# Altium PCB final_sensor_pcb.PcbDoc (part 2 of 3)
Units mm, origin at the board's own origin, x right, y up, seen from the top; angles counter-clockwise.
Board outline 100.5 x 21.64 mm, 2 copper layers (Top Layer, Bottom Layer); 86 components, 53 nets, 234 pads, 76 vias.
Unrouted connection lines stored in the file: 1.
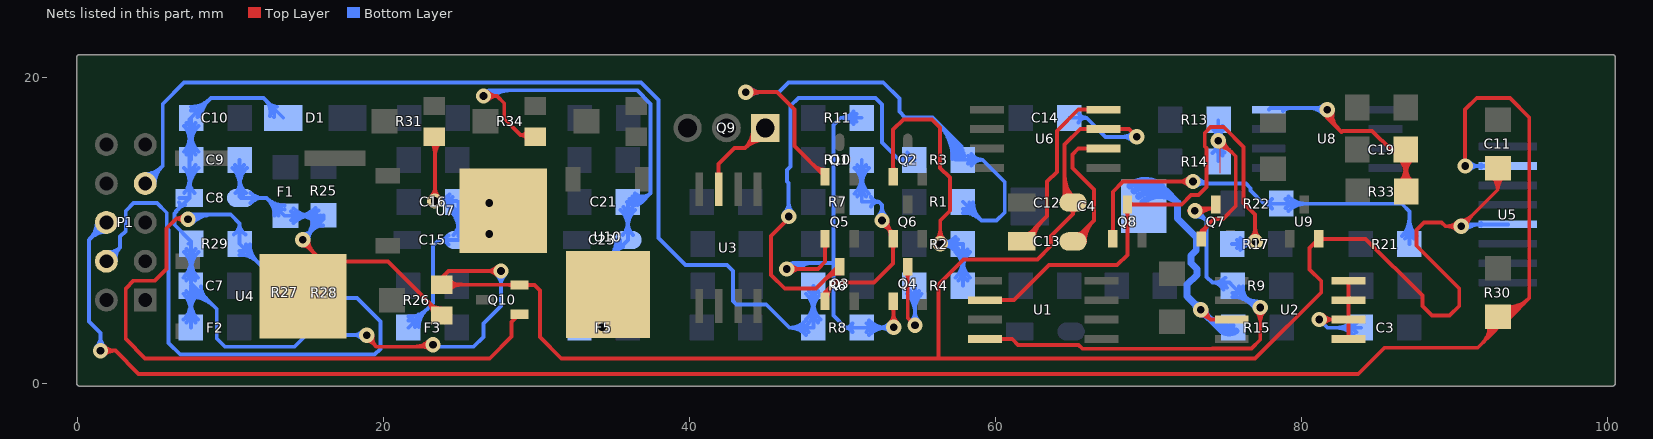
[diagram p2: the nets of this part, all layers, seen from the top]

## Via types
v1: diameter 1, hole 0.5, Top Layer to Bottom Layer, 76 vias

## Nets (pads, with @x,y where several pads share a name; then routed paths per layer and width w, separated by ;. In a path a pad name is that pad's centre, name@x,y a point inside that pad or via, vN(x,y) a via of type N, cw(c..) or ccw(c..) an arc to the next point about the centre after c; other vN are vias at no path point) (continued)
HGND: C7.1 C8.2 C9.1 C10.1 C11.1 C12.1 C14.1 D1.1 F2.2 Q10.2 R26.3 R28.1 R29.1 U5.4 U6.3 U9.2 | length 272.5
  Top Layer w0.254: v1@18.923,2.802 cw(c18.923,2.208) 19.343,2.628 ; v1(18.923,3.175) 18.796,3.175 19.558,2.413 23.241,2.413 v1(23.241,2.54) ; v1@19.291,3.113 ccw(c20.01,2.992) 19.494,2.477 ; 22.034,2.413 ccw(c22.034,3.747) v1@22.977,2.804 ; v1@22.977,2.276 ccw(c22.647,1.946) 22.647,2.413 ccw(c22.647,3.134) v1@23.157,2.624 ; R26.3@23.825,6.461 23.825,6.934 24.257,7.366 v1(27.686,7.366) ; R26.3@23.876,6.477 Q10.2@28.875,6.461 ; R26.3@24.258,6.125 cw(c25.101,5.277) 25.105,6.473 ; R26.3@24.261,6.794 ccw(c25.032,7.561) 25.029,6.473 ; v1@27.422,7.102 ccw(c26.786,6.466) 26.786,7.366 ccw(c26.786,8.266) v1@27.422,7.63 ; 28.154,6.463 cw(c28.152,5.978) Q10.2@28.496,6.32 ; 28.249,6.463 ccw(c28.25,6.813) Q10.2@28.497,6.565 ; Q10.2@28.894,6.442 29.88,6.442 30.226,6.096 30.226,3.048 31.623,1.651 76.962,1.651 81.28,5.969 81.28,6.707 80.518,7.469 80.518,8.86 U9.2@81.118,9.46 84.183,9.46 87.884,5.759 87.884,5.08 88.519,4.445 89.662,4.445 90.297,5.08 90.297,6.223 87.503,9.017 87.503,10.033 88.003,10.533 89.138,10.533 89.384,10.287 v1(90.424,10.287) 92.812,12.675 ; Q10.2@29.291,6.32 cw(c29.587,6.024) 29.587,6.442 cw(c29.587,6.86) Q10.2@29.291,6.564 ; 56.261,1.651 56.261,6.477 57.912,8.128 62.738,8.128 63.627,9.017 63.627,9.652 65.06,11.085 ; C12.1@64.426,12.171 ccw(c64.209,12.388) 64.516,12.388 ; 64.516,12.955 ccw(c65.879,12.955) C12.1@64.915,11.991 ; 64.516,13.568 ccw(c66.492,13.568) C12.1@65.095,12.171 ; C12.1@64.856,11.41 cw(c64.701,11.085) 65.06,11.085 ; C12.1@65.265,11.41 ccw(c65.42,11.085) 65.06,11.085 ; U6.3@66.119,16.55 ccw(c65.909,16.34) 65.909,16.637 ccw(c65.909,16.934) U6.3@66.119,16.724 ; U6.3@67.993,16.55 cw(c68.203,16.34) 68.203,16.637 cw(c68.203,16.934) U6.3@67.993,16.724 ; v1(69.215,16.129) 68.707,16.637 U6.3@67.056,16.637 65.532,16.637 64.516,15.621 64.516,12.381 C12.1@65.06,11.836 65.06,11.085 ; 80.795,9.137 cw(c81.107,8.826) U9.2@81.121,9.266 ; U9.2@81.24,9.338 cw(c81.536,9.042) 81.536,9.46 cw(c81.536,9.878) U9.2@81.24,9.582 ; v1@90.16,10.023 ccw(c89.524,9.387) 89.524,10.287 ccw(c89.524,11.187) v1@90.16,10.551 ; v1@90.424,10.66 ccw(c90.424,11.56) 91.061,10.924 ccw(c91.697,10.287) v1@90.797,10.287 ; C11.1@92.388,13.562 cw(c91.671,12.675) 92.812,12.675 ; C11.1@92.548,13.759 cw(c92.101,13.207) 92.812,13.207 cw(c93.522,13.207) C11.1@93.075,13.759 ; C11.1@92.62,13.44 cw(c92.543,13.183) 92.812,13.183 ; C11.1@93.003,13.44 ccw(c93.08,13.183) 92.812,13.183 ; C11.1@93.235,13.562 ccw(c93.953,12.675) 92.812,12.675 ; 92.812,12.675 C11.1@92.812,14.085 92.812,13.183
  Bottom Layer w0.254: 6.615,11.422 ccw(c6.377,11.66) C8.2@6.648,11.858 ; C8.2@6.676,12.137 C8.2@7.33,12.137 ; C8.2@6.735,11.542 cw(c7.03,11.247) C8.2@7.03,11.664 ; C7.1@6.941,5.875 cw(c5.763,4.697) 7.429,4.697 ; C7.1@6.941,6.927 ccw(c5.725,8.142) 7.444,8.142 ; F2.2@6.953,4.184 ccw(c5.804,5.332) 7.429,5.332 ccw(c9.054,5.332) F2.2@7.905,4.184 ; R29.1@6.969,8.618 cw(c5.82,7.469) 7.444,7.469 cw(c9.069,7.469) R29.1@7.92,8.618 ; C9.1@6.969,14.105 cw(c6.095,13.231) 7.33,13.231 ; C8.2@6.996,12.472 ccw(c6.188,13.279) 7.33,13.279 ccw(c8.472,13.279) C8.2@7.665,12.472 ; C7.1@7.121,6.055 cw(c6.376,5.31) 7.429,5.31 ; C7.1@7.121,6.747 ccw(c6.339,7.529) 7.444,7.529 ; F2.2@7.133,4.004 ccw(c6.417,4.719) 7.429,4.719 ccw(c8.44,4.719) F2.2@7.725,4.004 ; R29.1@7.148,8.798 cw(c6.433,8.083) 7.444,8.083 cw(c8.456,8.083) R29.1@7.741,8.798 ; C9.1@7.148,14.977 ccw(c6.433,15.692) 7.444,15.692 ccw(c8.456,15.692) 7.741,14.977 cw(c8.732,15.968) 7.33,15.968 ; C10.1@7.148,17.027 cw(c6.433,16.312) 7.444,16.312 cw(c8.456,16.312) 7.741,17.027 ccw(c8.732,16.036) 7.33,16.036 ; R29.1@7.263,9.144 R29.1@7.444,9.144 ; C8.2@7.33,12.68 cw(c9.345,12.68) C9.1@7.92,14.105 ; 7.33,13.293 cw(c8.732,13.293) C9.1@7.741,14.284 ; C9.1@7.33,15.423 cw(c9.345,15.423) 7.92,16.848 ccw(c9.069,15.699) 7.444,15.699 ccw(c5.82,15.699) 6.969,16.848 cw(c6.095,15.975) 7.33,15.975 ; 7.33,16.03 cw(c6.095,16.03) 6.969,15.156 ccw(c5.82,16.305) 7.444,16.305 ccw(c9.069,16.305) 7.92,15.156 cw(c9.345,16.581) C10.1@7.33,16.581 ; C7.1@7.417,5.678 cw(c7.417,3.507) 8.952,5.042 ; C7.1@7.417,5.932 cw(c7.417,4.375) 8.518,5.476 ; C7.1@7.417,6.186 cw(c7.417,5.242) C7.1@8.084,5.909 ; C7.1@7.417,6.401 7.429,6.389 F2.2@7.429,3.658 ; 7.429,4.755 cw(c9.013,4.755) C7.1@7.893,5.875 ; 7.429,5.368 cw(c8.399,5.368) C7.1@7.713,6.055 ; 7.444,7.396 ccw(c8.362,7.396) C7.1@7.713,6.747 ; 7.444,8.009 ccw(c8.975,8.009) C7.1@7.893,6.927 ; C9.1@7.444,14.63 C10.1@7.444,17.374 ; C10.1@7.444,17.843 ccw(c7.444,18.975) 8.245,18.174 ; C10.1@7.444,18.097 ccw(c7.444,19.842) 8.679,18.608 ; C10.1@7.863,17.424 cw(c8.754,17.424) C10.1@8.124,18.054 ; C7.1@8.09,6.351 ccw(c9.169,6.351) 8.406,5.588 ; C10.1@8.117,17.424 cw(c9.621,17.424) 8.558,18.487 ; 12.294,18.542 cw(c11.478,17.726) D1.1@12.604,17.476 ; 12.511,18.325 ccw(c13.062,18.876) D1.1@13.062,18.097 ; D1.1@12.621,18.215 cw(c12.013,17.607) D1.1@12.852,17.42 ; D1.1@13.462,17.374 12.167,18.669 8.74,18.669 C10.1@7.444,17.374 ; 14.92,3.135 ccw(c13.686,4.369) R28.1@15.431,4.369 ; 15.041,3.255 cw(c16.104,2.192) R28.1@16.104,3.696 ; 15.354,3.568 ccw(c14.553,4.369) R28.1@15.685,4.369 ; R28.1@15.474,3.689 cw(c16.104,3.059) R28.1@16.104,3.95 ; R28.1@16.204,3.696 cw(c16.204,2.192) 17.268,3.255 ; R28.1@16.204,3.95 cw(c16.204,3.059) R28.1@16.834,3.689 ; R28.1@16.623,4.352 ccw(c17.615,4.312) R28.1@16.913,3.61 ; R28.1@16.877,4.342 ccw(c18.404,4.281) 17.323,3.2 ; v1@18.659,2.911 ccw(c18.023,2.275) 18.023,3.175 ccw(c18.023,4.075) v1@18.659,3.439 ; v1(18.923,3.175) 17.348,3.175 R28.1@16.154,4.369 14.199,2.413 9.648,2.413 9.118,2.943 9.118,4.876 7.444,6.549 R29.1@7.444,9.144 ; v1(23.241,2.54) 23.368,2.413 25.901,2.413 26.543,3.055 26.543,3.937 27.686,5.08 v1(27.686,7.366) ; v1@27.422,7.102 cw(c26.786,6.466) 27.686,6.466 cw(c28.586,6.466) v1@27.95,7.102 ; C14.1@64.821,17.374 65.938,17.374 ; C14.1@65.416,17.059 cw(c65.938,16.782) 65.938,17.374 ; C14.1@65.416,17.688 ccw(c65.938,17.965) 65.938,17.374 ; v1@68.951,15.865 ccw(c68.315,15.229) 68.315,16.129 ccw(c68.315,17.029) v1@68.951,16.393 ; v1(69.215,16.129) 67.183,16.129 65.938,17.374 ; v1@90.424,10.414 U5.4@93.472,10.414 ; v1@90.508,10.203 cw(c91.018,9.693) 91.018,10.414 cw(c91.018,10.881) v1@90.688,10.551 ; v1@90.688,10.023 cw(c91.631,9.08) U5.4@91.631,10.414 ; U5.4@91.73,10.327 ccw(c91.52,10.117) 91.52,10.414 ccw(c91.52,10.711) U5.4@91.73,10.501 ; C8.2@7.33,12.137 6.465,11.272 6.477,11.259 6.477,11.232 6.358,11.113 6.358,10.383 7.444,9.297 R29.1@7.444,9.144 ; C8.2@7.33,12.137 7.33,17.259 C10.1@7.444,17.374
HMC_E\N\: P1.4 R27.2 | length 41.2
  Bottom Layer w0.254: P1.4@1.905,8.001 2.794,8.89 ; P1.4@1.989,8.618 ccw(c2.117,9.567) 2.794,8.89 ; P1.4@2.522,8.085 cw(c3.471,8.213) 2.794,8.89 ; R27.2@13.564,4.406 13.564,5.182 13.97,5.588 18.288,5.588 19.804,4.072 19.804,2.278 19.431,1.905 6.731,1.905 5.969,2.667 5.969,10.054 5.85,10.173 5.85,11.168 5.207,11.811 3.683,11.811 3.175,11.303 3.175,9.989 2.794,9.608 2.794,8.89
IN_RESET: Q7.3 R9.1 U1.4 | length 46.6
  Top Layer w0.254: U1.4@59.309,2.921 61.087,2.921 61.468,2.54 65.417,2.54 65.671,2.286 74.176,2.286 74.18,2.29 76.712,2.29 77.292,2.87 v1(77.292,4.977) ; U1.4@60.246,2.834 cw(c60.456,2.624) 60.456,2.921 cw(c60.456,3.218) U1.4@60.246,3.008 ; v1@72.644,11.303 72.797,11.456 Q7.3@74.389,11.456 ; v1@73.109,11.219 cw(c73.682,10.646) 73.682,11.456 ; v1@73.289,11.039 cw(c74.295,10.033) Q7.3@74.295,11.456 ; v1@73.289,11.567 ccw(c73.556,11.834) 73.556,11.456 ; 73.921,11.456 cw(c73.921,10.967) Q7.3@74.267,11.313 ; 74.023,11.456 ccw(c74.023,11.802) Q7.3@74.267,11.557 ; v1@77.028,4.713 cw(c76.391,4.076) 77.292,4.076 cw(c78.192,4.076) v1@77.556,4.713
  Bottom Layer w0.254: v1@72.898,11.303 73.152,11.303 73.787,10.668 73.787,6.985 74.168,6.604 ; v1@73.035,10.93 cw(c73.064,9.818) 73.85,10.605 ; v1@73.398,11.303 ccw(c73.992,11.303) 73.572,10.883 ; 74.233,6.604 ccw(c74.233,7.705) R9.1@75.012,6.927 ; 74.574,6.604 cw(c74.574,6.007) R9.1@75.11,6.268 ; R9.1@74.882,6.157 ccw(c74.168,5.811) 74.168,6.604 ; R9.1@75.487,5.678 cw(c75.487,3.932) 76.722,5.166 ; R9.1@75.487,5.932 cw(c75.487,4.799) 76.288,5.6 ; R9.1@75.906,6.351 ccw(c76.797,6.351) R9.1@76.167,5.721 ; R9.1@76.006,5.883 ccw(c77.292,7.169) v1@77.292,5.35 ; R9.1@76.16,6.351 ccw(c77.664,6.351) 76.601,5.287 ; 76.439,5.449 ccw(c77.292,6.302) v1@77.292,5.096 ; v1(77.292,4.977) 77.141,4.826 77.062,4.826 R9.1@75.487,6.401 75.284,6.604 74.168,6.604
  other v1: 73.025,11.303
IN_SET: Q8.3 R17.1 U1.2 | length 42.7
  Top Layer w0.254: U1.2@59.309,5.461 61.214,5.461 63.5,7.747 67.945,7.747 68.611,8.413 Q8.3@68.611,11.71 72.162,11.71 72.779,12.327 73.263,12.327 73.787,12.851 73.787,15.391 73.668,15.51 73.668,16.391 74.041,16.764 74.906,16.764 76.2,15.47 76.2,11.811 76.962,11.049 v1(76.962,9.271) ; U1.2@60.246,5.374 cw(c60.456,5.164) 60.456,5.461 cw(c60.456,5.758) U1.2@60.246,5.548 ; Q8.3@68.489,11.313 cw(c68.193,11.017) 68.611,11.017 cw(c69.029,11.017) Q8.3@68.733,11.313 ; Q8.3@68.733,11.588 cw(c69.029,11.292) 69.029,11.71 cw(c69.029,12.128) Q8.3@68.733,11.832 ; v1@76.698,9.535 ccw(c76.062,10.171) 76.962,10.171 ccw(c77.862,10.171) v1@77.226,9.535
  Bottom Layer w0.254: R17.1@75.45,9.128 v1@76.819,9.128 ; R17.1@75.715,9.128 ccw(c75.715,10.518) v1@76.698,9.535 ; R17.1@75.782,8.872 cw(c76.302,8.471) 76.302,9.128 cw(c76.302,9.784) R17.1@75.782,9.383 ; R17.1@75.983,8.717 cw(c76.819,8.073) v1@76.819,9.128 ; R17.1@75.983,9.538 ccw(c76.819,10.182) v1@76.819,9.128 ; 76.328,9.128 ccw(c76.328,9.905) v1@76.878,9.355 ; 76.408,9.128 cw(c76.408,8.717) v1@76.698,9.007 ; v1(76.962,9.271) v1@76.819,9.128
MICRO_ADC: P1.6 R30.1 U5.7 | length 149.7
  Top Layer w0.254: v1(1.524,2.159) 2.493,2.159 4.017,0.635 83.693,0.635 85.407,2.349 91.504,2.349 92.672,3.518 R30.1@92.672,4.229 ; v1@1.788,1.895 cw(c2.424,1.259) 2.424,2.159 cw(c2.424,3.059) v1@1.788,2.423 ; v1(90.678,14.224) 90.678,17.907 91.44,18.669 93.599,18.669 94.869,17.399 94.869,5.588 ; 91.884,2.73 ccw(c91.008,3.606) R30.1@92.144,4.101 ; 92.148,2.994 ccw(c91.376,3.766) R30.1@92.377,4.202 ; R30.1@92.253,3.81 R30.1@92.672,4.229 ; 92.412,3.258 ccw(c91.743,3.926) R30.1@92.61,4.303 ; R30.1@92.516,3.742 cw(c92.426,3.513) 92.672,3.513 cw(c92.86,3.513) R30.1@92.839,3.7 ; 92.676,3.522 ccw(c92.111,4.086) R30.1@92.843,4.404 ; R30.1@92.844,4.282 ccw(c93.072,5.387) 93.87,4.589 ; R30.1@92.895,4.53 ccw(c93.186,5.939) 94.203,4.922 ; R30.1@92.946,4.779 ccw(c93.3,6.491) 94.536,5.255 ; R30.1@92.998,5.028 ccw(c93.414,7.043) 94.869,5.588 ; R30.1@92.672,4.229 R30.1@92.812,4.369 93.65,4.369 94.869,5.588
  Bottom Layer w0.254: v1@1.26,2.423 ccw(c0.624,3.059) 1.524,3.059 ccw(c2.424,3.059) v1@1.788,2.423 ; P1.6@1.282,10.541 cw(c-0.222,10.541) 0.841,9.477 cw(c1.905,8.414) P1.6@1.905,9.918 ; v1(1.524,2.159) 1.524,3.302 0.762,4.064 0.762,9.398 P1.6@1.905,10.541 ; P1.6@1.536,10.541 cw(c0.645,10.541) 1.275,9.911 cw(c1.905,9.281) P1.6@1.905,10.172 ; v1(90.678,14.224) U5.7@93.472,14.224 ; v1@90.942,13.96 cw(c91.578,13.324) 91.578,14.224 cw(c91.578,15.124) v1@90.942,14.488 ; U5.7@91.73,14.137 ccw(c91.52,13.927) 91.52,14.224 ccw(c91.52,14.521) U5.7@91.73,14.311
N_CURRENT: P1.7 R6.2 R8.2 | length 80.8
  Bottom Layer w0.254: P1.7@4.445,12.803 P1.7@4.445,13.081 5.588,14.224 5.588,18.288 6.985,19.685 36.83,19.685 37.973,18.542 37.973,9.525 39.751,7.747 42.442,7.747 42.837,7.352 42.837,5.393 43.06,5.17 45.019,5.17 46.531,3.658 ; P1.7@4.445,13.45 ccw(c4.445,14.341) 5.075,13.711 ccw(c5.705,13.081) P1.7@4.814,13.081 ; P1.7@4.445,13.704 ccw(c4.445,15.208) 5.509,14.145 ccw(c6.572,13.081) P1.7@5.068,13.081 ; R8.2@47.605,3.195 ccw(c46.532,2.18) 46.532,3.658 ; R8.2@47.605,4.12 cw(c46.532,5.135) 46.532,3.658 ; R8.2@47.618,4.183 ccw(c46.469,5.332) 48.094,5.332 ccw(c49.719,5.332) R8.2@48.57,4.183 ; R6.2@47.618,5.875 cw(c46.469,4.726) 48.094,4.726 cw(c49.719,4.726) R6.2@48.57,5.875 ; R8.2@47.79,3.37 ccw(c47.121,2.738) 47.121,3.658 ccw(c47.121,4.578) R8.2@47.79,3.945 ; R8.2@47.798,4.004 ccw(c47.082,4.719) 48.094,4.719 ccw(c49.106,4.719) R8.2@48.39,4.004 ; R6.2@47.798,6.055 cw(c47.083,5.339) 48.094,5.339 cw(c49.106,5.339) R6.2@48.39,6.055 ; R6.2@48.094,6.401 R8.2@48.094,3.658 46.531,3.658
NetC3_1: C3.1 U2.5 U2.6 U2.7 U2.8 | length 17.5
  Top Layer w0.254: v1(81.153,4.191) U2.6@83.054,4.191 ; v1@81.417,3.927 cw(c82.054,3.29) 82.054,4.191 cw(c82.053,5.091) v1@81.417,4.455 ; U2.6@82.117,4.104 ccw(c81.907,3.894) 81.907,4.191 ccw(c81.907,4.488) U2.6@82.117,4.278 ; U2.5@82.967,3.008 ccw(c82.757,3.218) 83.054,3.218 ccw(c83.351,3.218) U2.5@83.141,3.008 ; U2.6@82.967,4.104 cw(c82.757,3.894) 83.054,3.894 cw(c83.351,3.894) U2.6@83.141,4.104 ; U2.6@82.967,4.278 ccw(c82.757,4.488) 83.054,4.488 ccw(c83.351,4.488) U2.6@83.141,4.278 ; U2.7@82.967,5.374 cw(c82.757,5.164) 83.054,5.164 cw(c83.351,5.164) U2.7@83.141,5.374 ; U2.7@82.967,5.548 ccw(c82.757,5.758) 83.054,5.758 ccw(c83.351,5.758) U2.7@83.141,5.548 ; U2.8@82.967,6.644 cw(c82.757,6.434) 83.054,6.434 cw(c83.351,6.434) U2.8@83.141,6.644 ; U2.5@83.054,2.921 U2.6@83.054,4.191 ; U2.8@83.054,6.731 U2.7@83.054,5.461 U2.6@83.054,4.191
  Bottom Layer w0.254: v1(81.153,4.191) 81.686,3.658 C3.1@83.871,3.658 ; C3.1@83.395,3.182 ccw(c82.246,2.033) 82.246,3.658 ccw(c82.246,5.282) C3.1@83.395,4.133 ; C3.1@83.575,3.361 ccw(c82.859,2.646) 82.859,3.658 ccw(c82.859,4.669) C3.1@83.575,3.954
NetC4_1: C4.1 R15.2 U2.3 | length 33
  Top Layer w0.254: v1(73.406,4.826) 74.041,4.191 ; v1@73.407,4.453 cw(c73.409,3.559) 74.041,4.191 ; v1@73.779,4.825 ccw(c74.673,4.823) 74.041,4.191 ; U2.3@74.501,4.104 ccw(c74.291,3.894) 74.291,4.191 ccw(c74.291,4.488) U2.3@74.501,4.278 ; U2.3@75.438,4.191 74.041,4.191
  Bottom Layer w0.254: C4.1@70.949,12.617 C4.1@71.12,12.617 ; R15.2@74.892,3.433 ccw(c74.574,3.321) 74.574,3.658 ; R15.2@74.892,3.882 cw(c74.574,3.994) 74.574,3.658 ; R15.2@75.526,3.658 74.574,3.658
  Bottom Layer w0.45: C4.1@68.766,12.926 cw(c69.784,11.708) C4.1@70.906,12.83 ; C4.1@69.055,12.581 cw(c70.101,11.329) 71.254,12.482 ; C4.1@69.343,12.235 cw(c70.418,10.95) 71.602,12.134 ; C4.1@69.632,11.89 cw(c70.734,10.571) 71.95,11.786 ; C4.1@71.12,12.617 71.882,11.855 71.882,10.795 73.115,9.562 73.115,8.726 72.771,8.382 72.771,7.874 73.152,7.493 73.152,7.112 72.517,6.477 72.517,5.715 v1(73.406,4.826) 74.574,3.658 ; v1@73.131,4.826 ccw(c72.467,4.826) 72.937,5.295 ccw(c73.406,5.765) v1@73.406,5.101 ; v1@73.406,4.551 cw(c73.406,3.887) 73.875,4.357 cw(c74.345,4.826) v1@73.681,4.826 ; 73.907,4.325 ccw(c74.643,5.061) R15.2@75.212,4.189 ; 74.299,3.933 ccw(c74.953,4.587) R15.2@75.458,3.812 ; 74.691,3.541 ccw(c75.262,4.112) R15.2@75.704,3.435
NetC8_1: C8.1 C9.2 F1.1 R25.2 R26.1 U4.2 | length 53.8
  Top Layer w0.254: v1@14.732,9.025 cw(c14.732,8.39) 15.181,8.839 ; v1(14.732,9.398) 14.859,9.525 14.859,9.161 U4.2@15.638,8.382 ; U4.2@14.749,5.715 17.027,7.993 20.293,7.993 R26.1@23.825,4.461 ; v1@15.105,9.398 ccw(c16.271,9.398) 15.447,8.573 ; 22.847,5.439 cw(c21.869,4.461) R26.1@23.252,4.461 ; 23.088,5.198 ccw(c23.725,5.834) R26.1@23.725,4.934 ; R26.1@23.28,5.006 cw(c22.736,4.461) R26.1@23.506,4.461
  Bottom Layer w0.254: C9.2@10.131,14.105 cw(c8.983,12.956) 10.607,12.956 cw(c12.232,12.956) C9.2@11.083,14.105 ; C9.2@10.311,14.284 cw(c9.596,13.569) 10.607,13.569 cw(c11.619,13.569) C9.2@10.904,14.284 ; C8.1@10.349,12.472 ccw(c9.724,13.097) 10.607,13.097 ; 10.607,12.849 ccw(c11.394,12.849) C8.1@10.838,12.292 ; 10.607,13.462 ccw(c12.008,13.462) C8.1@11.017,12.472 ; C9.2@10.607,14.63 10.607,12.213 C8.1@10.683,12.137 12.374,12.137 13.538,10.973 F1.1@13.614,10.973 R25.2@16.066,10.973 ; C8.1@11.317,11.803 cw(c12.125,10.995) 12.125,12.137 cw(c12.125,13.279) C8.1@11.317,12.472 ; 12.387,12.124 ccw(c13.542,13.279) F1.1@13.558,11.646 ; 12.434,12.077 cw(c11.33,10.973) F1.1@12.891,10.973 ; F1.1@12.815,11.696 ccw(c13.55,12.432) F1.1@13.56,11.392 ; F1.1@12.868,11.643 cw(c12.197,10.973) F1.1@13.145,10.973 ; F1.1@13.961,10.677 cw(c14.676,9.961) 14.676,10.973 cw(c14.676,11.984) F1.1@13.961,11.269 ; F1.1@14.14,10.497 cw(c15.289,9.348) 15.289,10.973 cw(c15.289,12.598) F1.1@14.14,11.449 ; F1.1@14.339,10.973 ccw(c14.339,12.725) R25.2@15.578,11.486 ; 14.519,10.973 cw(c14.519,9.476) R25.2@15.578,10.534 ; v1(14.732,9.398) 16.104,10.77 R25.2@16.104,11.01 ; v1@14.732,9.771 ccw(c14.732,10.671) 15.369,10.035 ccw(c16.005,9.398) v1@15.105,9.398 ; v1@14.877,9.543 ccw(c13.637,10.784) R25.2@15.384,10.947 ; 14.952,10.973 ccw(c14.952,12.112) R25.2@15.757,11.306 ; 15.132,10.973 cw(c15.132,10.089) R25.2@15.757,10.714 ; 15.259,9.925 ccw(c14.336,10.849) R25.2@15.636,10.971 ; 15.401,10.067 cw(c16.054,9.414) R25.2@16.054,10.337 ; R25.2@15.642,10.308 ccw(c15.034,10.915) R25.2@15.889,10.995
NetC13_1: C13.1 U6.2 | length 12.3
  Top Layer w0.254: C13.1@65.06,9.296 66.421,10.657 66.421,12.7 65.024,14.097 65.024,14.986 65.405,15.367 U6.2@67.056,15.367 ; C13.1@65.36,9.769 ccw(c65.36,10.187) 65.656,9.892 ; C13.1@65.579,9.296 cw(c66.832,9.296) 65.946,10.182 ; C13.1@65.833,9.296 cw(c67.7,9.296) 66.38,10.616 ; U6.2@66.119,15.28 ccw(c65.909,15.07) 65.909,15.367 ccw(c65.909,15.664) U6.2@66.119,15.454
NetC13_2: C13.2 U6.4 | length 15
  Top Layer w0.254: C13.2@61.708,9.296 63.373,10.962 63.373,13.208 64.008,13.843 64.008,16.51 65.405,17.907 U6.4@67.056,17.907 ; C13.2@62.008,9.769 ccw(c62.008,10.187) C13.2@62.303,9.892 ; C13.2@62.227,9.296 cw(c63.48,9.296) 62.594,10.182 ; C13.2@62.481,9.296 cw(c64.347,9.296) 63.027,10.616 ; U6.4@66.119,17.82 ccw(c65.909,17.61) 65.909,17.907 ccw(c65.909,18.204) U6.4@66.119,17.994
NetC15_1: C15.1 C16.2 F3.1 R31.1 U7.2 | length 50.3
  Top Layer w0.254: R31.1@23.083,15.811 cw(c22.393,15.121) 23.368,15.121 ; v1@23.104,12.202 ccw(c22.468,12.838) 23.368,12.838 ccw(c24.268,12.838) v1@23.632,12.202 ; R31.1@23.317,16.145 23.368,16.094 v1(23.368,11.938) ; 23.368,14.885 cw(c24.677,14.885) R31.1@23.751,15.811 ; 23.368,15.498 cw(c24.064,15.498) R31.1@23.572,15.99
  Bottom Layer w0.254: F3.1@21.641,3.658 23.241,5.258 23.241,9.017 23.618,9.394 ; F3.1@21.641,4.127 ccw(c21.641,5.259) 22.441,4.458 ; F3.1@21.641,4.381 ccw(c21.641,6.126) 22.875,4.892 ; F3.1@22.06,3.708 cw(c22.951,3.708) F3.1@22.321,4.338 ; F3.1@22.314,3.708 cw(c23.818,3.708) 22.754,4.771 ; v1@23.632,11.674 cw(c24.268,11.038) 24.268,11.938 cw(c24.268,12.838) v1@23.632,12.202 ; 23.92,11.938 cw(c23.92,11.158) C16.2@24.512,11.665 ; 23.921,11.938 ccw(c23.921,12.718) C16.2@24.513,12.21 ; C15.1@24.252,9.094 ccw(c23.618,8.575) 23.618,9.394 ; C15.1@24.252,9.694 cw(c23.618,10.213) 23.618,9.394 ; C16.2@24.319,11.5 ccw(c23.368,10.686) v1(23.368,11.938) ; C16.2@24.32,12.376 cw(c23.368,13.192) v1(23.368,11.938) ; C16.2@24.355,11.361 cw(c22.997,10.003) 24.917,10.003 ; C16.2@24.534,11.541 cw(c23.61,10.617) 24.917,10.617 ; C15.1@24.583,9.728 ccw(c23.775,10.536) 24.917,10.536 ccw(c26.059,10.536) C15.1@25.252,9.728 ; C15.1@24.917,9.394 23.618,9.394 ; 24.917,10.422 cw(c26.246,10.422) C16.2@25.307,11.361 ; 24.917,11.035 cw(c25.633,11.035) C16.2@25.127,11.541 ; C16.2@25.127,11.591 cw(c25.842,10.876) 25.842,11.887 cw(c25.842,12.899) C16.2@25.127,12.184 ; C16.2@25.307,11.411 cw(c26.456,10.263) 26.456,11.887 cw(c26.456,13.512) C16.2@25.307,12.363 ; C15.1@25.376,9.243 cw(c26.331,8.333) 26.331,9.652 ; C15.1@25.56,9.068 cw(c26.924,7.767) 26.924,9.652 24.917,9.652 24.917,11.801 C16.2@24.831,11.887 ; C15.1@25.717,9.652 ccw(c25.717,10.986) v1@26.66,10.043 ; 25.839,11.887 cw(c25.839,10.726) v1@26.66,11.547 ; 26.208,11.887 ccw(c26.208,12.527) v1@26.66,12.075 ; v1@26.66,9.515 ccw(c26.33,9.185) 26.33,9.652 ccw(c26.33,10.373) v1@26.84,9.863 ; v1(26.924,11.811) 26.848,11.887 C16.2@24.831,11.887 ; v1(23.368,11.938) 24.78,11.938 C16.2@24.831,11.887
  other v1: 26.924,9.779
NetC19_2: C19.2 R33.1 U8.8 | length 27.7
  Top Layer w0.254: v1@81.529,17.935 ccw(c82.14,17.804) 81.698,17.362 ; v1(81.661,17.907) 81.661,17.399 82.611,16.449 82.684,16.522 84.6,16.522 85.831,15.291 ; v1@81.777,17.882 ccw(c82.682,17.687) 82.028,17.032 ; v1@82.026,17.828 ccw(c83.224,17.57) 82.357,16.703 ; C19.2@86.176,15.053 ccw(c85.831,14.922) 85.831,15.291 ; C19.2@86.176,15.529 cw(c85.831,15.659) 85.831,15.291 ; C19.2@86.329,14.765 cw(c85.18,13.616) 86.805,13.616 ; R33.1@86.341,13.074 ccw(c85.221,14.193) 86.805,14.193 ; C19.2@86.509,14.945 cw(c85.794,14.229) 86.805,14.229 ; R33.1@86.521,12.894 ccw(c85.835,13.58) 86.805,13.58 ; R33.1@86.805,12.56 C19.2@86.805,15.291 85.831,15.291 ; 86.805,13.616 cw(c88.43,13.616) C19.2@87.281,14.765 ; 86.805,13.638 ccw(c87.858,13.638) R33.1@87.113,12.894 ; 86.805,14.229 cw(c87.817,14.229) C19.2@87.101,14.945 ; 86.805,14.251 ccw(c88.471,14.251) R33.1@87.293,13.074
  Bottom Layer w0.254: U8.8@77.855,17.907 77.974,18.026 81.542,18.026 v1(81.661,17.907) ; U8.8@78.792,17.82 cw(c79.289,17.323) 79.289,18.026 ; 80.473,18.026 cw(c80.473,16.719) v1@81.397,17.643 ; 81.048,18.026 ccw(c81.048,18.52) v1@81.397,18.171 ; 81.086,18.026 cw(c81.086,17.332) v1@81.577,17.823
NetC21_2: C21.2 C23.1 F5.1 R34.1 U10.2 | length 71.5
  Top Layer w0.254: v1@26.289,18.923 v1@26.543,18.669 ; v1@26.416,18.796 27.432,18.796 ; v1@26.809,18.535 cw(c27.432,17.923) 27.432,18.796 ; v1@26.809,19.057 ccw(c27.432,19.669) 27.432,18.796 ; R34.1@29.382,15.968 ccw(c28.956,15.796) 28.956,16.256 ; R34.1@29.484,16.477 cw(c28.956,16.997) 28.956,16.256 ; R34.1@29.921,16.145 29.81,16.256 28.956,16.256 ; U10.2@34.026,3.947 ccw(c32.47,5.503) U10.2@34.671,5.503 ; U10.2@34.206,3.767 ccw(c33.083,4.89) U10.2@34.671,4.89 ; v1(34.29,3.683) 34.671,3.302 U10.2@34.671,5.825 ; U10.2@34.385,3.588 ccw(c33.696,4.277) U10.2@34.671,4.277 ; 27.432,18.796 27.902,18.326 27.902,17.31 28.956,16.256
  Bottom Layer w0.254: v1@26.448,18.891 cw(c27.137,18.202) 27.137,19.177 ; v1(26.543,18.796) 26.924,19.177 36.576,19.177 37.465,18.288 37.465,12.446 ; v1@26.627,18.712 cw(c27.75,17.589) 27.75,19.177 ; v1@26.807,18.532 cw(c28.363,16.976) 28.363,19.177 ; F5.1@32.817,4.127 ccw(c32.817,5.259) 33.617,4.458 ; F5.1@32.817,4.381 ccw(c32.817,6.126) 34.051,4.892 ; F5.1@33.137,3.388 cw(c33.718,2.898) 33.718,3.658 cw(c33.718,4.418) F5.1@33.137,3.928 ; F5.1@33.236,3.708 cw(c34.127,3.708) F5.1@33.497,4.338 ; F5.1@33.328,3.658 ccw(c33.328,4.645) v1@34.026,3.947 ; F5.1@33.331,3.224 cw(c34.265,2.437) v1@34.265,3.658 ; F5.1@33.331,4.092 ccw(c34.265,4.878) v1@34.265,3.658 ; F5.1@33.451,3.658 cw(c33.451,2.844) v1@34.026,3.419 ; F5.1@33.49,3.708 cw(c34.994,3.708) 33.93,4.771 ; v1(34.29,3.683) v1@34.265,3.658 ; 34.694,8.111 ccw(c33.461,9.344) C23.1@35.205,9.383 ; 35.114,8.531 ccw(c34.282,9.363) C23.1@35.458,9.389 ; 35.382,8.799 cw(c35.677,8.503) C23.1@35.677,8.921 ; C21.2@35.504,11.361 cw(c34.361,10.218) 35.977,10.218 ; C23.1@35.643,9.728 ccw(c34.836,10.536) 35.977,10.536 ccw(c37.119,10.536) C23.1@36.312,9.728 ; C21.2@35.684,11.541 cw(c34.974,10.831) 35.977,10.831 ; C21.2@35.919,11.872 ccw(c36.405,12.392) 36.908,11.889 ; 35.977,10.207 cw(c37.61,10.207) C21.2@36.456,11.361 ; 35.977,10.82 cw(c36.997,10.82) C21.2@36.276,11.541 ; C21.2@35.98,11.887 C21.2@35.977,11.885 ; C21.2@36.092,12.058 ccw(c36.584,12.584) 37.094,12.075 ; C21.2@36.266,12.243 ccw(c36.764,12.776) 37.279,12.26 ; C21.2@36.439,12.429 ccw(c36.943,12.968) 37.465,12.446 ; C21.2@36.62,11.679 cw(c36.904,11.586) 36.904,11.885 ; C21.2@36.621,12.092 ccw(c36.904,12.182) 36.904,11.885 ; v1@34.265,3.658 F5.1@32.817,3.658 34.544,5.385 34.544,7.961 C23.1@35.977,9.394 C21.2@35.977,11.885 ; C21.2@35.977,11.885 36.904,11.885 ; 36.904,11.885 37.465,12.446
NetQ1_1: Q1.1 R1.1 R3.1 | length 54.4
  Top Layer w0.254: v1(43.688,19.05) 45.728,19.05 46.863,17.915 46.863,15.526 Q1.1@48.865,13.524 ; v1@43.952,18.786 cw(c44.588,18.15) 44.588,19.05 cw(c44.588,19.95) v1@43.952,19.314 ; 48.1,14.289 ccw(c48.865,15.054) Q1.1@48.865,13.972 ; 48.534,13.855 ccw(c48.865,14.186) Q1.1@48.865,13.718
  Bottom Layer w0.254: v1(43.688,19.05) 45.847,19.05 46.482,19.685 52.661,19.685 53.711,18.635 53.711,17.78 54.092,17.399 55.88,17.399 57.785,15.494 R3.1@57.785,14.63 ; v1@43.952,18.786 cw(c44.588,18.15) 44.588,19.05 cw(c44.588,19.95) v1@43.952,19.314 ; 56.191,17.088 cw(c53.783,14.68) R3.1@57.188,14.68 ; 56.624,16.655 cw(c54.65,14.68) R3.1@57.442,14.68 ; 57.058,16.221 cw(c55.517,14.68) R3.1@57.696,14.68 ; R3.1@57.379,14.63 R3.1@57.785,14.63 ; 57.492,15.787 cw(c56.385,14.68) R3.1@57.95,14.68 ; R1.1@57.861,11.164 cw(c57.861,9.419) 59.095,10.653 ; R1.1@57.861,11.418 cw(c57.861,10.286) 58.662,11.086 ; R1.1@57.861,11.887 59.08,10.668 60.071,10.668 60.599,11.196 60.599,13.188 59.157,14.63 ; R3.1@58.204,14.389 cw(c58.668,14.064) 58.668,14.63 cw(c58.668,15.197) R3.1@58.204,14.871 ; R1.1@58.28,11.837 ccw(c59.171,11.837) R1.1@58.541,11.207 ; R3.1@58.412,14.243 cw(c59.157,13.72) 59.157,14.63 ; R3.1@58.412,15.017 ccw(c59.157,15.541) 59.157,14.63 ; R1.1@58.534,11.837 ccw(c60.038,11.837) 58.975,10.774 ; R3.1@57.785,14.63 R3.1@57.861,14.63 59.157,14.63
NetQ2_1: Q2.1 R2.1 R4.1 | length 35
  Top Layer w0.254: Q2.1@53.188,13.921 ccw(c52.892,14.217) 53.31,14.217 ccw(c53.728,14.217) Q2.1@53.432,13.921 ; Q2.1@53.31,13.524 53.31,16.607 53.975,17.272 55.856,17.272 56.38,16.748 56.38,14.105 57.023,13.462 57.023,11.303 56.388,10.668 v1(56.388,9.144) ; v1@56.124,9.408 ccw(c55.488,10.044) 56.388,10.044 ccw(c57.288,10.044) v1@56.652,9.408
  Bottom Layer w0.254: v1(56.388,9.144) 56.294,9.144 v1@56.277,9.128 ; v1@56.652,8.88 cw(c57.249,8.283) R2.1@57.249,9.128 ; v1@56.652,9.408 ccw(c57.328,10.084) R2.1@57.328,9.128 ; R2.1@57.377,8.66 ccw(c56.277,7.601) v1@56.277,9.128 ; R2.1@57.377,9.595 cw(c56.277,10.654) v1@56.277,9.128 ; R4.1@57.385,6.927 ccw(c56.236,8.076) 57.861,8.076 ccw(c59.486,8.076) R4.1@58.337,6.927 ; R2.1@57.385,8.602 cw(c56.236,7.453) 57.861,7.453 cw(c59.486,7.453) R2.1@58.337,8.602 ; R2.1@57.56,8.837 ccw(c56.875,8.177) 56.875,9.128 ccw(c56.875,10.078) R2.1@57.56,9.418 ; R4.1@57.565,6.747 ccw(c56.85,7.462) 57.861,7.462 ccw(c58.873,7.462) R4.1@58.157,6.747 ; R2.1@57.565,8.781 cw(c56.85,8.066) 57.861,8.066 cw(c58.873,8.066) R2.1@58.157,8.781 ; R4.1@57.861,6.401 R2.1@57.861,9.128 v1@56.277,9.128
NetQ3_1: Q3.1 Q6.1 R7.1 R10.1 | length 29.4
  Top Layer w0.254: Q3.1@48.776,5.819 ccw(c48.68,5.978) 48.865,5.978 ; Q3.1@48.784,5.671 cw(c49.329,5.671) 48.944,6.056 ; Q3.1@48.865,5.396 48.865,5.978 ; Q3.1@48.954,5.819 cw(c49.05,5.978) 48.865,5.978 ; Q3.1@49.038,5.671 cw(c50.196,5.671) 49.377,6.49 ; v1@52.578,10.295 cw(c52.578,9.701) 52.998,10.121 ; v1(52.578,10.668) 52.578,10.414 52.705,10.414 52.832,10.541 52.832,10.287 53.31,9.809 Q6.1@53.31,9.46 53.31,7.844 52.07,6.604 49.491,6.604 48.865,5.978 ; v1@52.95,10.647 ccw(c53.965,10.591) Q6.1@53.246,9.873 ; 52.962,10.157 cw(c52.541,9.735) Q6.1@53.137,9.735 ; Q6.1@53.188,9.063 cw(c52.892,8.767) 53.31,8.767 cw(c53.728,8.767) Q6.1@53.432,9.063
  Bottom Layer w0.254: R7.1@50.781,12.413 ccw(c49.632,13.562) 51.257,13.562 ccw(c52.882,13.562) R7.1@51.733,12.413 ; R10.1@50.781,14.104 cw(c49.632,12.956) 51.257,12.956 cw(c52.882,12.956) R10.1@51.733,14.104 ; R7.1@50.961,12.233 ccw(c50.246,12.949) 51.257,12.949 ccw(c52.269,12.949) R7.1@51.553,12.233 ; R10.1@50.961,14.284 cw(c50.246,13.569) 51.257,13.569 cw(c52.269,13.569) R10.1@51.553,14.284 ; R10.1@51.257,14.63 R7.1@51.257,11.887 52.375,11.887 ; R7.1@51.852,11.572 cw(c52.375,11.296) 52.375,11.887 ; R7.1@51.852,12.202 ccw(c52.375,12.479) 52.375,11.887 ; v1@52.314,10.932 ccw(c51.678,11.568) 52.578,11.568 ccw(c53.478,11.568) v1@52.842,10.932 ; v1@52.578,10.795 52.578,11.684 52.375,11.887
NetQ3_3: Q3.3 R3.2 | length 33.7
  Top Layer w0.254: v1@46.101,10.922 v1(46.482,10.922) 46.482,10.795 45.339,9.652 45.339,7.112 46.228,6.223 48.278,6.223 49.701,7.646 Q3.3@49.815,7.646 ; 48.856,6.801 cw(c49.815,5.842) Q3.3@49.815,7.198 ; 49.29,7.234 cw(c49.815,6.709) Q3.3@49.815,7.452 ; Q3.3@49.723,7.668 cw(c49.815,7.576) Q3.3@49.815,7.706
  Bottom Layer w0.254: v1@46.218,11.186 ccw(c45.582,11.822) 46.482,11.822 ccw(c47.382,11.822) v1@46.746,11.186 ; v1(46.482,10.922) 46.482,13.105 46.363,13.224 46.363,13.954 46.609,14.2 46.609,18.161 47.117,18.669 52.151,18.669 52.578,18.242 52.578,15.748 53.696,14.63 ; R3.2@54.075,14.376 ccw(c53.696,14.22) 53.696,14.63 ; R3.2@54.075,14.885 cw(c53.696,15.041) 53.696,14.63 ; R3.2@54.229,15.1 R3.2@54.698,14.63 53.696,14.63
NetQ4_1: Q4.1 Q5.1 R8.1 R11.1 | length 45.9
  Top Layer w0.254: v1(46.355,7.493) 48.387,7.493 48.865,7.971 Q5.1@48.865,9.46 Q5.1@48.8,9.525 ; v1@46.619,7.229 cw(c47.255,6.593) 47.255,7.493 cw(c47.255,8.393) v1@46.619,7.757 ; Q5.1@48.743,9.063 cw(c48.447,8.767) 48.865,8.767 cw(c49.283,8.767) Q5.1@48.987,9.063 ; v1@53.076,3.947 ccw(c52.44,4.583) 53.34,4.583 ccw(c54.24,4.583) v1@53.604,3.947 ; Q4.1@53.188,4.999 cw(c52.82,4.631) 53.34,4.631 ; v1(53.34,3.683) Q4.1@53.34,5.366 ; 53.34,4.776 cw(c53.655,4.776) Q4.1@53.432,4.999
  Bottom Layer w0.254: v1@46.26,7.588 cw(c47.004,6.844) 47.004,7.897 ; v1(46.355,7.493) 46.759,7.897 49.299,7.897 49.403,8.001 ; v1@46.439,7.409 cw(c47.617,6.231) 47.617,7.897 ; v1@46.619,7.229 cw(c48.23,5.618) 48.23,7.897 ; R8.1@50.65,3.368 ccw(c50.19,3.149) 50.19,3.658 ; R8.1@50.65,3.947 cw(c50.19,4.166) 50.19,3.658 ; R11.1@50.725,16.962 ccw(c49.886,16.312) 49.886,17.374 ; R11.1@50.725,17.785 cw(c49.886,18.435) 49.886,17.374 ; R11.1@50.926,17.117 ccw(c50.403,16.713) 50.403,17.374 ccw(c50.403,18.034) R11.1@50.926,17.63 ; R11.1@51.257,17.374 49.886,17.374 ; R8.1@51.553,3.361 cw(c52.269,2.646) 52.269,3.658 cw(c52.269,4.669) R8.1@51.553,3.954 ; R8.1@51.733,3.182 cw(c52.882,2.033) 52.882,3.658 cw(c52.882,5.282) R8.1@51.733,4.133 ; 52.378,3.658 ccw(c52.378,4.645) v1@53.076,3.947 ; 52.501,3.658 cw(c52.501,2.844) v1@53.076,3.419 ; v1(53.34,3.683) 53.315,3.658 R8.1@51.257,3.658 50.19,3.658 ; 49.403,8.001 49.403,16.891 49.886,17.374 ; 49.403,8.001 49.403,4.445 50.19,3.658
NetQ4_3: Q4.3 R4.2 | length 12.9
  Top Layer w0.254: Q4.3@54.138,7.249 cw(c53.842,6.953) 54.26,6.953 cw(c54.678,6.953) Q4.3@54.382,7.249 ; Q4.3@54.26,7.646 54.26,4.287 v1(54.737,3.81)
  Bottom Layer w0.254: R4.2@54.222,5.875 cw(c52.98,4.632) 54.737,4.632 ; R4.2@54.402,6.055 cw(c53.593,5.246) 54.737,5.246 ; v1@54.473,4.074 ccw(c53.837,4.71) 54.737,4.71 ccw(c55.637,4.71) v1@55.001,4.074 ; R4.2@54.698,6.401 54.737,6.362 v1(54.737,3.81) ; 54.737,4.82 cw(c56.229,4.82) R4.2@55.174,5.875 ; 54.737,5.433 cw(c55.616,5.433) R4.2@54.994,6.055
NetQ7_1: Q7.1 R13.2 R14.2 | length 23.6
  Top Layer w0: 74.676,13.74 v1@74.676,15.748
  Top Layer w0.254: Q7.1@73.359,9.66 cw(c73.838,9.66) 73.499,9.999 ; Q7.1@73.44,9.491 Q7.1@73.44,9.46 73.44,9.94 74.254,10.754 74.847,10.754 75.692,11.599 75.692,14.859 v1@74.676,15.875 ; Q7.1@73.613,9.66 cw(c74.705,9.66) 73.933,10.433 ; v1@74.549,15.502 cw(c74.549,14.295) 75.403,15.148 ; v1@74.549,15.756 cw(c74.549,15.162) 74.969,15.582 ; v1@74.922,15.875 ccw(c75.516,15.875) 75.096,15.455
  Bottom Layer w0.254: R14.2@74.166,15.079 ccw(c73.53,15.875) v1(74.549,15.875) ; R13.2@74.166,16.671 cw(c73.529,15.875) v1(74.549,15.875) ; v1@74.285,15.611 cw(c73.649,14.975) 74.549,14.975 cw(c75.449,14.975) v1@74.813,15.611 ; v1@74.285,16.139 ccw(c73.649,16.775) 74.549,16.775 ccw(c75.449,16.775) v1@74.813,16.139 ; R14.2@74.549,14.541 v1(74.549,15.875) ; v1@74.549,15.402 ccw(c75.148,15.402) R14.2@74.818,14.903 ; v1@74.549,16.347 cw(c75.149,16.347) R13.2@74.818,16.847 ; R13.2@74.549,17.209 v1(74.549,15.875) ; R14.2@74.958,15.115 cw(c75.461,15.875) v1(74.549,15.875) ; R13.2@74.958,16.635 ccw(c75.461,15.875) v1(74.549,15.875)
NetQ8_1: Q8.1 R21.2 R22.2 | length 39.4
  Top Layer w0.254: Q8.1@67.539,9.857 ccw(c67.243,10.153) 67.661,10.153 ccw(c68.079,10.153) Q8.1@67.783,9.857 ; Q8.1@67.661,9.46 67.661,12.543 68.326,13.208 v1(72.898,13.208) ; v1@72.634,12.944 ccw(c71.998,12.308) 71.998,13.208 ccw(c71.998,14.108) v1@72.634,13.472
  Bottom Layer w0.254: v1(72.898,13.208) 73.025,13.081 76.355,13.081 76.668,12.768 76.668,12.613 77.521,11.76 ; v1@72.982,13.292 ccw(c73.492,13.802) 73.492,13.081 ccw(c73.492,12.614) v1@73.162,12.944 ; v1@73.162,13.472 ccw(c74.105,14.415) 74.105,13.081 ; R22.2@78.058,11.44 ccw(c77.521,11.149) 77.521,11.76 ; R22.2@78.058,12.08 cw(c77.521,12.371) 77.521,11.76 ; R22.2@78.947,11.464 cw(c79.662,10.748) 79.662,11.76 cw(c79.662,12.772) R22.2@78.947,12.056 ; R22.2@79.126,11.284 cw(c80.275,10.135) 80.275,11.76 cw(c80.275,13.385) R22.2@79.126,12.236 ; R21.2@86.558,9.653 ccw(c85.409,10.802) 87.034,10.802 ccw(c88.659,10.802) R21.2@87.51,9.653 ; R21.2@86.738,9.474 ccw(c86.022,10.189) 87.034,10.189 ccw(c88.045,10.189) R21.2@87.33,9.474 ; R21.2@87.034,9.127 87.034,11.264 86.538,11.76 R22.2@78.65,11.76 77.521,11.76
NetQ9_1: Q9.1 U3.7 | length 11.2
  Top Layer w0.254: U3.7@41.823,13.633 ccw(c41.613,13.843) 41.91,13.843 ccw(c42.207,13.843) U3.7@41.997,13.633 ; U3.7@41.91,12.696 41.91,14.351 42.951,15.392 43.631,15.392 44.952,16.713 Q9.1@44.958,16.713 Q9.1@44.831,16.586 ; Q9.1@44.048,15.809 cw(c44.918,14.939) Q9.1@44.946,16.169 ; Q9.1@44.053,15.814 ccw(c43.18,16.686) Q9.1@44.414,16.705 ; Q9.1@44.16,16.701 cw(c42.343,16.674) 43.628,15.389 cw(c44.899,14.118) Q9.1@44.94,15.915
NetQ10_1: Q10.1 R27.1 R29.2 | length 61.1
  Top Layer w0.254: v1@6.924,10.549 ccw(c6.477,10.267) 6.477,10.795 ; v1@6.969,11.006 cw(c6.477,11.475) 6.477,10.795 ; v1@7.239,10.414 v1(7.239,10.748) ; v1@7.239,10.541 6.985,10.795 6.477,10.795 ; Q10.1@28.894,4.542 28.386,4.034 28.386,3.086 26.951,1.651 4.438,1.651 3.175,2.914 3.175,6.23 3.676,6.731 5.08,6.731 5.842,7.493 5.842,10.16 6.477,10.795
  Bottom Layer w0.254: v1@6.985,10.987 7.047,11.049 10.033,11.049 10.607,10.475 ; v1@7.144,10.844 cw(c7.64,10.348) 7.64,11.049 ; v1@7.323,10.664 cw(c8.253,9.734) 8.253,11.049 ; v1@7.503,10.484 cw(c8.866,9.121) 8.866,11.049 ; R29.2@10.226,9.748 ccw(c9.726,10.475) 10.607,10.475 ; R29.2@10.607,8.421 cw(c10.607,6.676) 11.842,7.91 ; R29.2@10.607,8.675 cw(c10.607,7.543) 11.408,8.343 ; R29.2@10.989,9.748 cw(c11.489,10.475) 10.607,10.475 ; R29.2@11.026,9.094 ccw(c11.917,9.094) R29.2@11.287,8.464 ; R29.2@11.28,9.094 ccw(c12.784,9.094) 11.721,8.031 ; R27.1@12.972,7.17 ccw(c12.182,6.589) 12.182,7.569 ; R27.1@12.972,7.968 cw(c12.182,8.55) 12.182,7.569 ; R27.1@13.176,7.321 ccw(c12.685,6.959) 12.685,7.569 ccw(c12.685,8.18) R27.1@13.176,7.818 ; R27.1@13.564,7.569 12.182,7.569 ; 10.607,10.475 R29.2@10.607,9.144 12.182,7.569